# EAGLE board mini layout_ modify with small R (EAGLE 5.11)
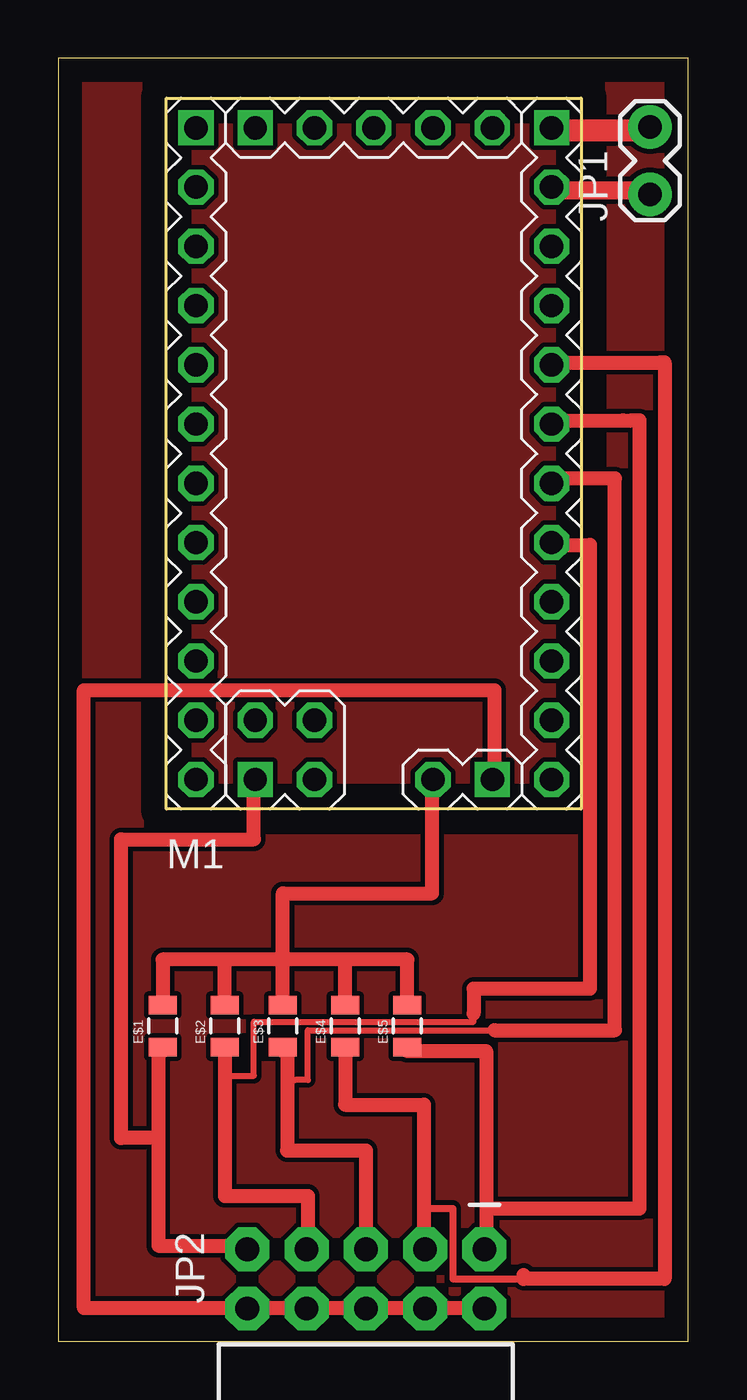
[diagram p0: board, top side]
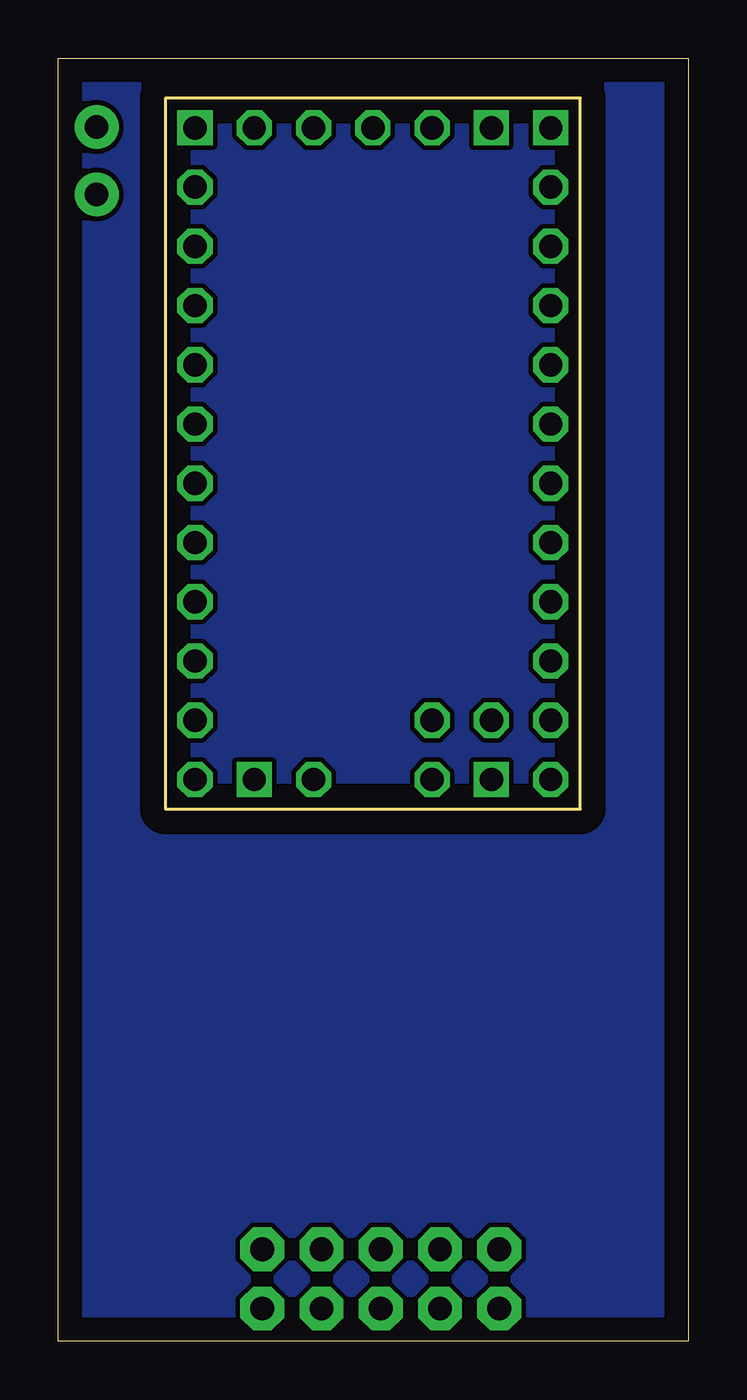
[diagram p1: board, bottom side, seen from below]

Size 27 x 55 mm. Coordinates in mm from the lower left corner, seen from the top.
Outline: 0,0 27,0 27,55 0,55 0,0
Copper layers (1*16): Top 0.035mm / dielectric 1.5mm / Bottom 0.035mm
Design rules "default": minimum track width 10mil, minimum drill 24mil, track to track 8mil, track to pad 8mil, pad to pad 8mil, via to via 8mil, smd to smd 8mil, copper to edge 40mil, drill to drill 8mil, minimum pad ring 10mil, minimum via ring 8mil, stop-mask expansion 4mil, vias tented up to drill 0mil, thermal gap 10mil

## Footprints (pad centres in the part's own frame; a part is rotated, then mirrored left to right if it is on the bottom)
0805 = smd 0.8 x 1.2: 1 -0.9,0; 2 0.9,0
1X02_LOCK = drill 1.016 pad 1.88 round: 1 -0.178,0; 2 2.718,0
2X5-RA = drill 1.016 pad 1.88 octagon: 1 -1.27,5.08; 2 1.27,5.08; 3 -1.27,2.54; 4 1.27,2.54; 5 -1.27,0; 6 1.27,0; 7 -1.27,-2.54; 8 1.27,-2.54; 9 -1.27,-5.08; 10 1.27,-5.08
MINI04_ALL_PINS = drill 1 octagon: +5V@1 10.16,0; +5V@2 5.08,-20.32; +5V@3 5.08,7.62; AD0 10.16,-10.16; AD1 10.16,-7.62; AD2 10.16,-5.08; AD3 10.16,-2.54; AD5 0,-20.32; AD6 -2.54,-17.78; AD7 0,-17.78; D2 -5.08,-2.54; D3 -5.08,-5.08; D4 -5.08,-7.62; D5 -5.08,-10.16; D6 -5.08,-12.7; D7 -5.08,-15.24; D8 -5.08,-17.78; D9 -5.08,-20.32; D10 10.16,-20.32; D11 10.16,-17.78; D12 10.16,-15.24; D13 10.16,-12.7; GND@1 -5.08,0; GND@2 10.16,5.08; GND@4 7.62,7.62; RESET@1 -5.08,2.54; RESET@2 10.16,2.54; RX@1 -5.08,5.08; RX@2 2.54,7.62; TX@2 0,7.62 | drill 1 square: +9V 10.16,7.62; AD4 -2.54,-20.32; GND@3 7.62,-20.32; IO7 -2.54,7.62; TX@1 -5.08,7.62

## Placement (x,y rotation side)
E$1  [0805]  4.47,13.51 90 top
E$2  [0805]  7.13,13.51 90 top
E$3  [0805]  9.62,13.51 90 top
E$4  [0805]  12.29,13.51 90 top
E$5  [0805]  14.96,13.51 90 top
JP1  [1X02_LOCK]  25.36,49.34 90 top
JP2  M05X2RA  [2X5-RA]  13.18,2.67 270 top
M1  MINI04_ALL_PINS  [MINI04_ALL_PINS]  10.98,44.4 0 top

## Library data of the parts
E$1-E$5 JP1 JP2 = SparkFun
M1 = arduino

## Nets
S$4: JP2.1
S$10: JP2.2
S$11: JP2.10

## Tracks (layer width: path | path; a pad name or v marks a point on that pad's centre or on a via)
N$5
  pour Top: 0,55 27,55 27,0 0,0
N$11
  pour Bottom: 0,55 27,55 27,0 0,0
S$1
  Top 0.61: 4.47,12.45 4.29,12.45 4.29,8.71 | 4.29,8.71 4.29,4.09 8.2,4.09 8.2,3.91 | 4.29,8.71 2.69,8.71 2.69,21.51 8.38,21.51 8.38,24
S$2
  Top 0.61: 21.18,49.43 25.09,49.43 25.27,49.25 | 21,49.25 25.27,49.25 | 25.27,49.25 25.45,49.07
S$3
  Top 0.61: 21,52.09 25.27,52.09 25.45,51.92
S$4
  Top 0.254: JP2.1 18.16,4.09
S$5
  Top 0.61: 20.82,51.74 25.09,51.74 25.45,52.09
S$6
  Top 0.61: 18.16,1.42 1.09,1.42 1.09,27.91 18.69,27.91 18.69,24
S$7
  Top 0.61: 7.13,12.62 7.13,6.22 10.69,6.22 10.69,4.09
S$8
  Top 0.61: 9.62,12.45 9.8,12.45 9.8,8.18 13.18,8.18 13.18,4.09
S$9
  Top 0.61: 21.18,41.96 25.8,41.96
S$10
  Bottom 0.254: JP2.2 18.34,1.42
S$11
  Bottom 0.254: JP2.10 8.02,1.42
S$12
  Top 0.254: 7.31,11.38 8.38,11.38 8.38,13.69 17.8,13.69 17.8,14.05 17.8,14.94
  Top 0.61: 21.36,34.14 22.78,34.14 22.78,15.11 17.8,15.11 17.8,14.05
S$13
  Top 0.61: 9.62,16.54 9.62,19.2 16.02,19.2 16.02,24.18
S$15
  Top 0.61: 12.29,12.45 12.29,10.13 15.67,10.13 15.67,3.91
S$16
  Top 0.61: 14.96,12.45 18.34,12.45 18.34,3.91
S$17
  Top 0.61: 14.96,14.58 14.96,16.36 7.13,16.36 | 7.13,16.36 4.47,16.36 4.47,14.58 | 7.13,14.4 7.13,16.36
S$18
  Top 0.61: 9.62,14.58 9.62,16.18
S$19
  Top 0.61: 12.29,14.4 12.29,16.18
S$21
  Top 0.254: 18.69,13.34 10.69,13.34 10.69,11.2 10.16,11.2
  Top 0.61: 18.69,13.34 23.85,13.34 23.85,36.98 21.18,36.98 21.18,36.8
S$22
  Top 0.305: 16.02,5.69 16.91,5.69 16.91,2.67 20.11,2.67
S$23
  Top 0.61: 25.98,41.96 25.98,2.67 19.94,2.67 19.94,2.85
S$24
  Top 0.61: 18.69,5.69 24.91,5.69 24.91,39.47 24.56,39.47 24.2,39.47 21,39.47